# Altium PCB Sensors.PcbDoc
Units mil, origin at the board's own origin, x right, y up, seen from the top; angles counter-clockwise.
Board outline 742 x 851 mil, 2 copper layers (Top Layer, Bottom Layer); 7 components, 10 nets, 55 pads, 68 vias.
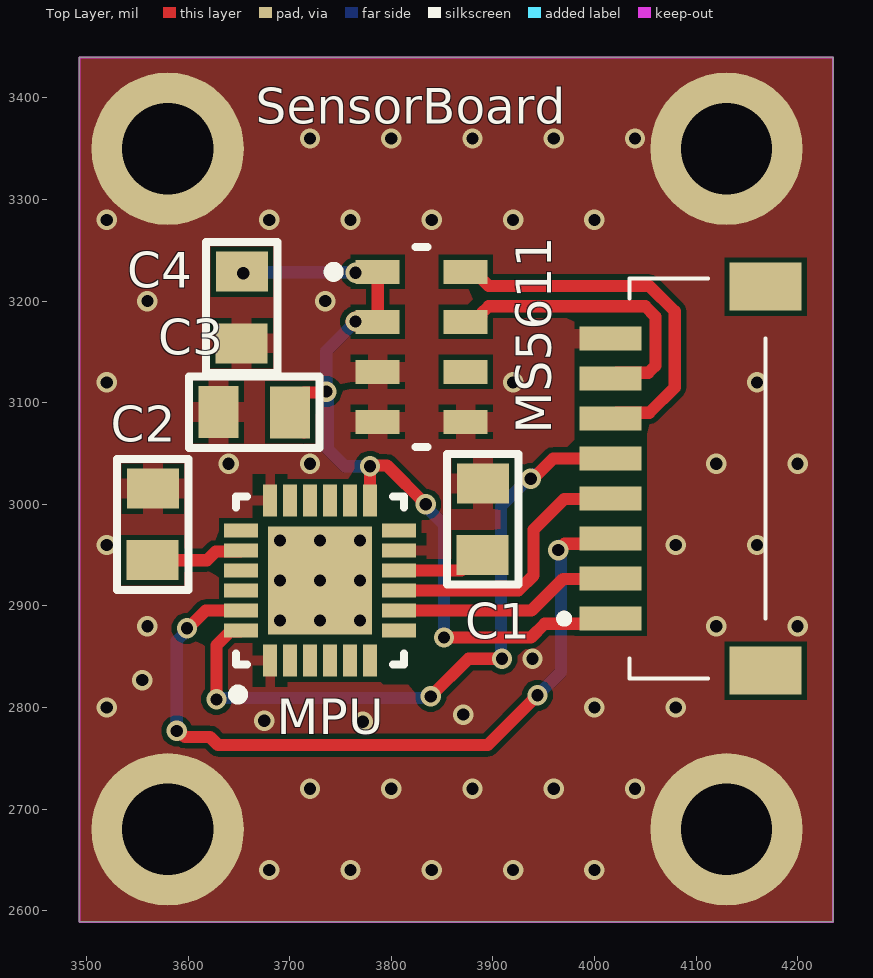
[diagram p0: Top Layer view]
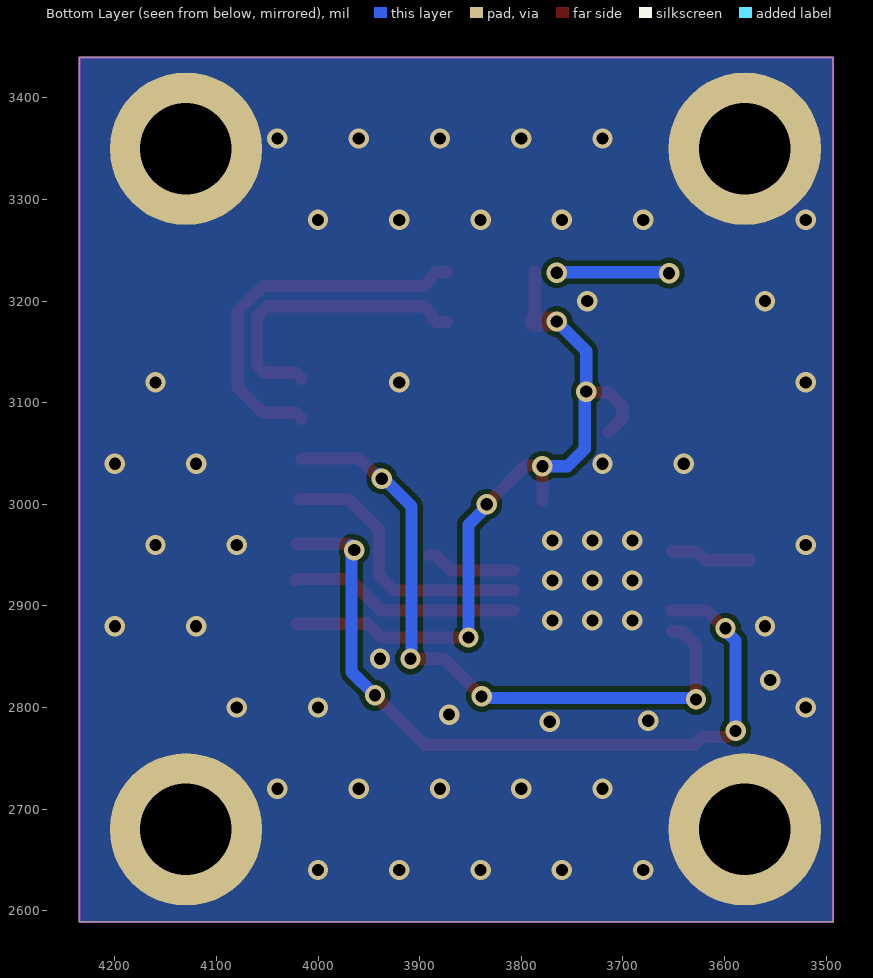
[diagram p1: Bottom Layer view, seen from below]
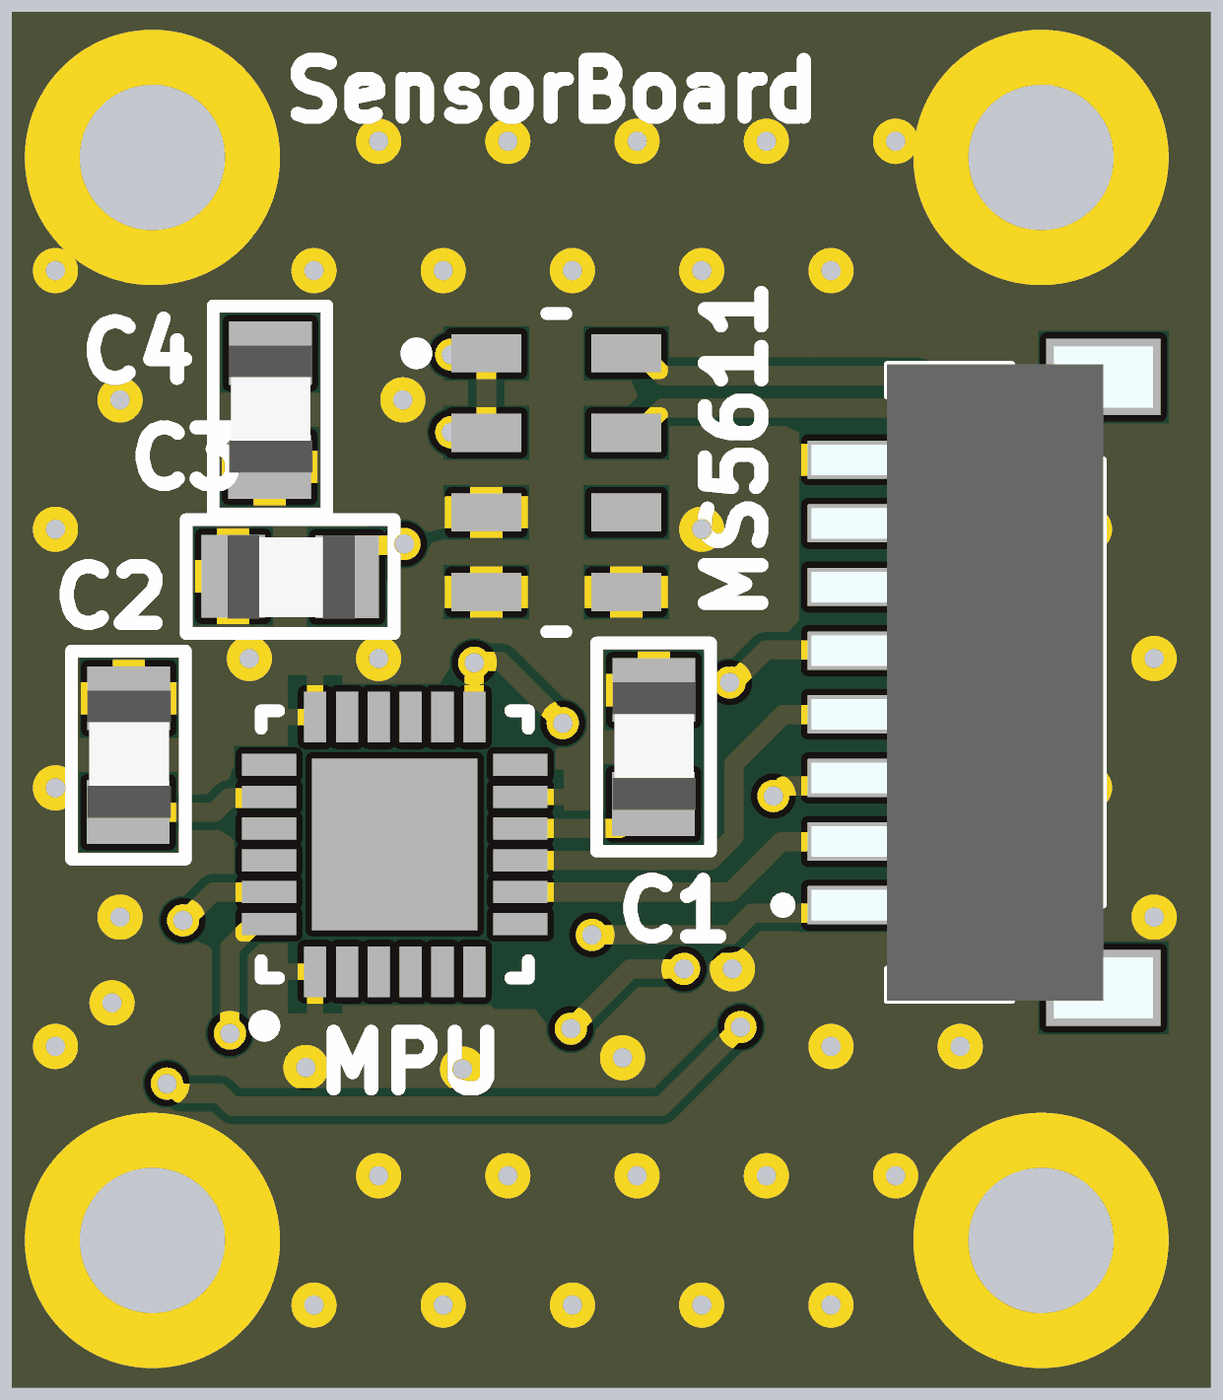
[diagram p2: 3D render of the assembled board from above, using the file's embedded part models]

## Layer stack, top to bottom
Top Solder: solder mask 0.4, Solder Resist, Dk 3.5
Top Layer: signal copper 1.4
Dielectric 1: dielectric 12.6, FR-4, Dk 4.8
Bottom Layer: signal copper 1.4
Bottom Solder: solder mask 0.4, Solder Resist, Dk 3.5

## Board outline
3493,2589 3493,3440 4235,3440 4235,2589

## Design rules (kind name [scope] priority, off if disabled: settings)
Clearance [All] p1: gap=5 ignorepadtopadclearanceinfootprint=FALSE except(0: Arc-Hole Track-Hole SMDPad-Hole THPad-Hole Via-Hole Fill-Hole Poly-Hole Region-Hole Text-Hole)
PolygonConnect [All] p1: connectstyle=Relief reliefconductorwidth=10 reliefentries=4 polygonreliefangle="90 Angle" airgapwidth=10
RoutingVias [All] p1: holewidth=12 width=20 viastyle="Through Hole" minholewidth=8 minwidth=16 maxholewidth=30 maxwidth=50
SolderMaskExpansion [All] p1: expansion=4 istentingtop=FALSE
Width [All] p1: maxlimit=200 minlimit=10 preferedwidth=20
30 further rules are at their usual default settings.

## Classes and differential pairs
component class Sensors: C1 C2 C3 C4 "Sensor Board" SensorBoard

## Components (designator, comment, footprint, x,y, rotation, side; value= is the part's Value field where it differs from the comment)
C1 "CMS_0805" CONDENSATEUR_CMS_0805 3890,2950 r90 top value=100nF
C2 "CMS_0805" CONDENSATEUR_CMS_0805 3565,2945 r90 top value=2.2nF
C3 "CMS_0805" CONDENSATEUR_CMS_0805 3630,3090.91 r0 top value=100nF
C4 "CMS_0805" CONDENSATEUR_CMS_0805 3652.61,3158.53 r90 top value=100nF
MPU "MPU-6000" INSE-QFN-24_V 3730,2925 r90 top
MS5611 "MS561101BA03-50" MSI-MS561101BA03-50-8_V 3830,3155 r0 top
SensorBoard "SM08B-SRSS-TB__LF__SN_" SM08BSRSSTBLFSN 4092.3,3025.2 r90 top

## Footprints (in the part's own frame and the unit in brackets; to place one, negate y for a bottom-side part, rotate by r counter-clockwise, add the part's x,y. Pads: shape width x height; smd on the part's side, far side on the other; paste and mask are expansions set on the pad)
CONDENSATEUR_CMS_0805 [mm] "CONDENSATEUR CMS 0805 ; DIMENSIONS : 2mm x 1.25mm"
  rect 1x1.3 smd: 1(0,0) 2(1.79,-0.01)
  silkscreen extent -0.74,-0.9 2.53,0.89, body extent -0.09,-0.67 1.91,0.64, height 0.73
INSE-QFN-24_V [mm] "QFN, 24-Leads, Body 4.00x4.00mm, Pitch 0.50mm, Thermal Pad 2.7x2.6mm"
  rect 0.8x0.35 smd: 1(-2,1.25) 2(-2,0.75) 3(-2,0.25) 4(-2,-0.25) 5(-2,-0.75) 6(-2,-1.25) 13(2,-1.25) 14(2,-0.75) 15(2,-0.25) 16(2,0.25) 17(2,0.75) 18(2,1.25)
  rect 0.35x0.85 smd: 7(-1.25,-1.975) 8(-0.75,-1.975) 9(-0.25,-1.975) 10(0.25,-1.975) 11(0.75,-1.975) 12(1.25,-1.975) 19(1.25,1.975) 20(0.75,1.975) 21(0.25,1.975) 22(-0.25,1.975) 23(-0.75,1.975) 24(-1.25,1.975)
  rect 2.7x2.6 smd: 25(0,0)
  silkscreen extent -2.97,-2.1 2.1,2.17, body extent -2,-2 2,2, height 0.95
MSI-MS561101BA03-50-8_V [mm] "SMD, 8-Leads, Body 5x3mm, Pitch 1.25mm"
  rect 1.1x0.6 smd: 1(-1.1,1.875) 2(-1.1,0.625) 3(-1.1,-0.625) 4(-1.1,-1.875) 5(1.1,-1.875) 6(1.1,-0.625) 7(1.1,0.625) 8(1.1,1.875)
  silkscreen extent -2.32,-2.5 0.15,2.5, body extent -1.5,-2.5 1.5,2.5, height 1
SM08BSRSSTBLFSN [mm]
  rect 0.6x1.55 smd: 1(-3.5,1.938) 2(-2.5,1.938) 3(-1.5,1.938) 4(-0.5,1.938) 5(0.5,1.938) 6(1.5,1.938) 7(2.5,1.938) 8(3.5,1.938)
  rect 1.2x1.8 smd: MP1(-4.8,-1.938) MP2(4.8,-1.938)
  silkscreen extent -5,-1.94 5,3.2, body extent -5.28,-2.72 5.28,2.65, height 3

## Part data
C1 C2 C3 C4: library part CONDENSATEUR_CMS_CER_0805, "CONDENSATEUR CMS CERAMIQUE 0805", Type=CMS_0805
MPU: library part CMP-2000-05008-1, "3-Axis Gyroscope 3-Axis Accelerometer Motion Processing Unit with I2C and SPI, 2.5, 3 or 3.3 V, -40 to 85 degC, 24-Pin QFN, RoHS, Tape and Reel", Manufacturer=InvenSense, Operating Temperature=-40degC~85degC(TA), Package Description="24-Pin Quad Flat No-lead Package, Body 4 x 4 mm, Pitch 0.5 mm", Package Reference=QFN-24, Standard Package=5,000, Category=Sensors,Transducers, Datasheet URL=https://www.invensense.com/wp-content/uploads/2015/02/MPU-6000-Datasheet1.pdf, Datasheet Version="Rev. 3.4, 08/2013", Family=Multifunction, Featured Product=MPU60006AxisIntegratedSPISolution, Manufacturer URL=http://www.invensense.com/, Online Catalog=MPU-6000™Series, Other Names="1428-1005-2 / MPU6000", Output Type=I²C,SPI, Sensor Type=Accelerometer,Gyroscope,3Axis
MS5611: library part CMP-2000-05251-1, "Barometric Pressure Sensor, with Stainless Steel Cap, 1.8 to 3.6 V, -45 to 85 degC, 8-Pin QFN, RoHS, Tape and Reel", Manufacturer="Measurement Specialties", Operating Pressure Max=1200mbar, Operating Pressure Min=10mbar, Operating Temperature Max=85degC, Operating Temperature Min=-40degC, Package Description="8-Pin Surface Mount Device, Body 5 x 3 mm, Pitch 1.25 mm", Package Reference=MS561101BA03-50-8, Sensor Case Style=QFN, Supply Current=12.5µA, Supply Voltage Max=3.6V, Supply Voltage Min=1.8V, Connection Size=0.5mm, Datasheet URL=http://www.te.com/commerce/DocumentDelivery/DDEController?Action=srchrtrv&DocNm=MS5611-01BA03&DocType=Data+Sheet&DocLang=English&DocFormat=pdf&PartCntxt=CAT-BLPS0036, Datasheet Version=Sep-15, Manufacturer URL=http://www.meas-spec.com/, No. of Pins=8, Pressure Type=Barometric, SVHC=NoSVHC(20-Jun-2013)
SensorBoard: "Connector", Arrow Part Number="SM08B-SRSS-TB (LF)(SN)", Manufacturer_Name="JST (JAPAN SOLDERLESS TERMINALS)", Arrow Price/Stock=https://www.arrow.com/en/products/sm08b-srss-tb-lf-sn/jst-manufacturing, Datasheet Link=http://docs-emea.rs-online.com/webdocs/082f/0900766b8082f545.pdf, Height=2.9mm, Manufacturer_Part_Number="SM08B-SRSS-TB (LF)(SN)"

## Free pads (board coordinates)
  round 150 hole 90: 2(3580,2680) 2(3580,3350) 2(4130,2680) 2(4130,3350)

## Via types
v1: diameter 20, hole 12, Top Layer to Bottom Layer, 68 vias

## Nets (pads, with @x,y where several pads share a name; then routed paths per layer and width w, separated by ;. In a path a pad name is that pad's centre, name@x,y a point inside that pad or via, vN(x,y) a via of type N, cw(c..) or ccw(c..) an arc to the next point about the centre after c; other vN are vias at no path point)
3V3: C3.2 C4.2 MPU.13 MS5611.1 MS5611.2 SensorBoard.1 | length 861.5
  Top Layer w12: C4.2 v1(3654.47,3227.53) ; C3.2@3714.16,3070.92 3700.47,3084.61 3700.47,3096.42 3714.16,3110.1 3735.2,3110.1 v1(3736,3110.91) ; MPU.13 v1(3779.21,3037.42) 3780,3038.2 3795.8,3038.2 v1(3834,3000) ; MS5611.2 MS5611.1 ; v1(3852,2869) 3937.63,2869 3951.04,2882.41 SensorBoard.1@4021,2882.41
  Top Layer w20: v1(3765,3180) 3786.3,3180 MS5611.2
  Bottom Layer w12: v1(3654.47,3227.53) 3655.44,3228.5 3764.5,3228.5 v1(3765,3228) ; v1(3765,3180) 3736,3151 3736,3105 3737.53,3103.47 3737.53,3054.47 3754.58,3037.42 v1(3779.21,3037.42) ; v1(3834,3000) 3834,2997.84 3852,2979.84 v1(3852,2869)
GND: C1.2 C2.2 C3.1 C4.1 MPU.1 MPU.11 MPU.18 MPU.25 MS5611.3 MS5611.4 MS5611.5 pad.2 SensorBoard.8
  other v1: 3680,2640 3760,2640 3840,2640 3920,2640 4000,2640 3720,2720 3800,2720 3880,2720 3960,2720 4040,2720 3772,2786 3675,2787 3871,2793 3520,2800 4000,2800 4080,2800 3555,2827 3939,2848 3560,2880 4120,2880 4200,2880 3690.63,2885.63 3730,2885.63 3769.37,2885.63 3690.63,2925 3730,2925 3769.37,2925 3520,2960 4080,2960 4160,2960 3690.63,2964.37 3730,2964.37 3769.37,2964.37 3640,3040 3720,3040 4120,3040 4200,3040 3520,3120 3920,3120 4160,3120 3560,3200 3735,3200 3520,3280 3680,3280 3760,3280 3840,3280 3920,3280 4000,3280 3720,3360 3800,3360 3880,3360 3960,3360 4040,3360
I2C1_SCL: MS5611.8 SensorBoard.6 | length 373.1
  Top Layer w12: MS5611.8 3883.15,3228.82 3888.96,3223.01 3888.96,3222.03 3895.99,3215 4054,3215 4079,3190 4079,3115 4054.07,3090.07 4021.81,3090.07 SensorBoard.6
I2C1_SDA: MS5611.7 SensorBoard.7 | length 296.5
  Top Layer w12: MS5611.7 3883.15,3179.61 3888.96,3185.42 3888.96,3187.97 3895.99,3195 4049.96,3195 4060,3184.96 4060,3136.47 4052.97,3129.44 4021.81,3129.44 SensorBoard.7
MPU_CS: MPU.8 SensorBoard.2 | length 227.9
  Top Layer w12: MPU.8 3937.97,2895.47 3969.07,2926.57 4020.55,2926.57 SensorBoard.2@4022.13,2925
NetC1_1: C1.1 MPU.10 | length 88.5
  Top Layer w12: MPU.10 3868.94,2934.84 3884.09,2950 C1.1
NetC2_1: C2.1 MPU.20 | length 81.2
  Top Layer w12: C2.1@3575,2945 3618.59,2945 3627.23,2953.64 3651.35,2953.64 MPU.20
SPI3_MISO: MPU.9 SensorBoard.4 | length 274.6
  Top Layer w12: MPU.9 3925.16,2915.16 3940,2930 3940,2975 3970.32,3005.32 SensorBoard.4@4018.7,3005.32
SPI3_MOSI: MPU.24 SensorBoard.5 | length 663.9
  Top Layer w12: v1(3628,2808) 3628,2861.39 3641.51,2874.9 3651.35,2874.9 MPU.24 ; v1(3839,2811) 3876,2848 v1(3909,2848) ; v1(3937.3,3025.2) 3939.46,3025.2 3959.46,3045.2 4015.68,3045.2 SensorBoard.5
  Bottom Layer w12: v1(3628,2808) 3629.5,2809.5 3837.5,2809.5 v1(3839,2811) ; v1(3909,2848) 3908,2849 3908,2998 v1@3940,3030
SPI3_SCK: MPU.23 SensorBoard.3 | length 763.2
  Top Layer w12: v1(3589,2777) 3591.16,2777 3597.16,2771 3621.64,2771 3629.64,2763 3895,2763 v1(3944,2812) ; v1(3599,2878) 3600.04,2878 3617.51,2895.47 MPU.23 ; v1(3964.34,2954.94) 3970.55,2961.15 SensorBoard.3@4021,2961.15
  Bottom Layer w12: v1(3589,2777) 3589,2865.84 3599,2875.84 v1(3599,2878) ; v1(3944,2812) 3967.04,2835.04 v1@3967.04,2959.74
pads on no net: MPU.2 MPU.3 MPU.4 MPU.5 MPU.6 MPU.7 MPU.12 MPU.14 MPU.15 MPU.16 MPU.17 MPU.19 MPU.21 MPU.22 MS5611.6 SensorBoard.MP1 SensorBoard.MP2

## Polygon pours and split planes (outlines as drawn)
GND on Top Layer "GND_L01_P001" (solid, pour order 1): 3493,3440 3493,2589 4235,2589 4235,3440
GND on Bottom Layer "GND_L02_P000" (solid, pour order 0): 3493,3440 3493,2589 4235,2589 4235,3440

## Keep-outs
Keep-Out Layer:
  the board outline again, w2

## Other copper
Top Layer:
  pour cut-out: 3789,2826 3791,2828 3791,2866 3843,2866 3848,2861 3857,2861 3860,2858 3860,2843 3840,2823 3792,2823
  pour cut-out: 3908,2994 3908,2976 3909.27,2974.73 3923.87,2974.73 3952.08,3002.95 3946.42,3008.61 3946.42,3011.42 3932.36,3011.42 3931.5,3012.28 3927.88,3008.66 3920.98,3008.66 3920.98,2995.79

## Silkscreen, mask and mechanical layers (free items; w line width, h text height)
Mechanical 15:
  the board outline again, w10